# EAGLE board board (EAGLE 6.5.0)
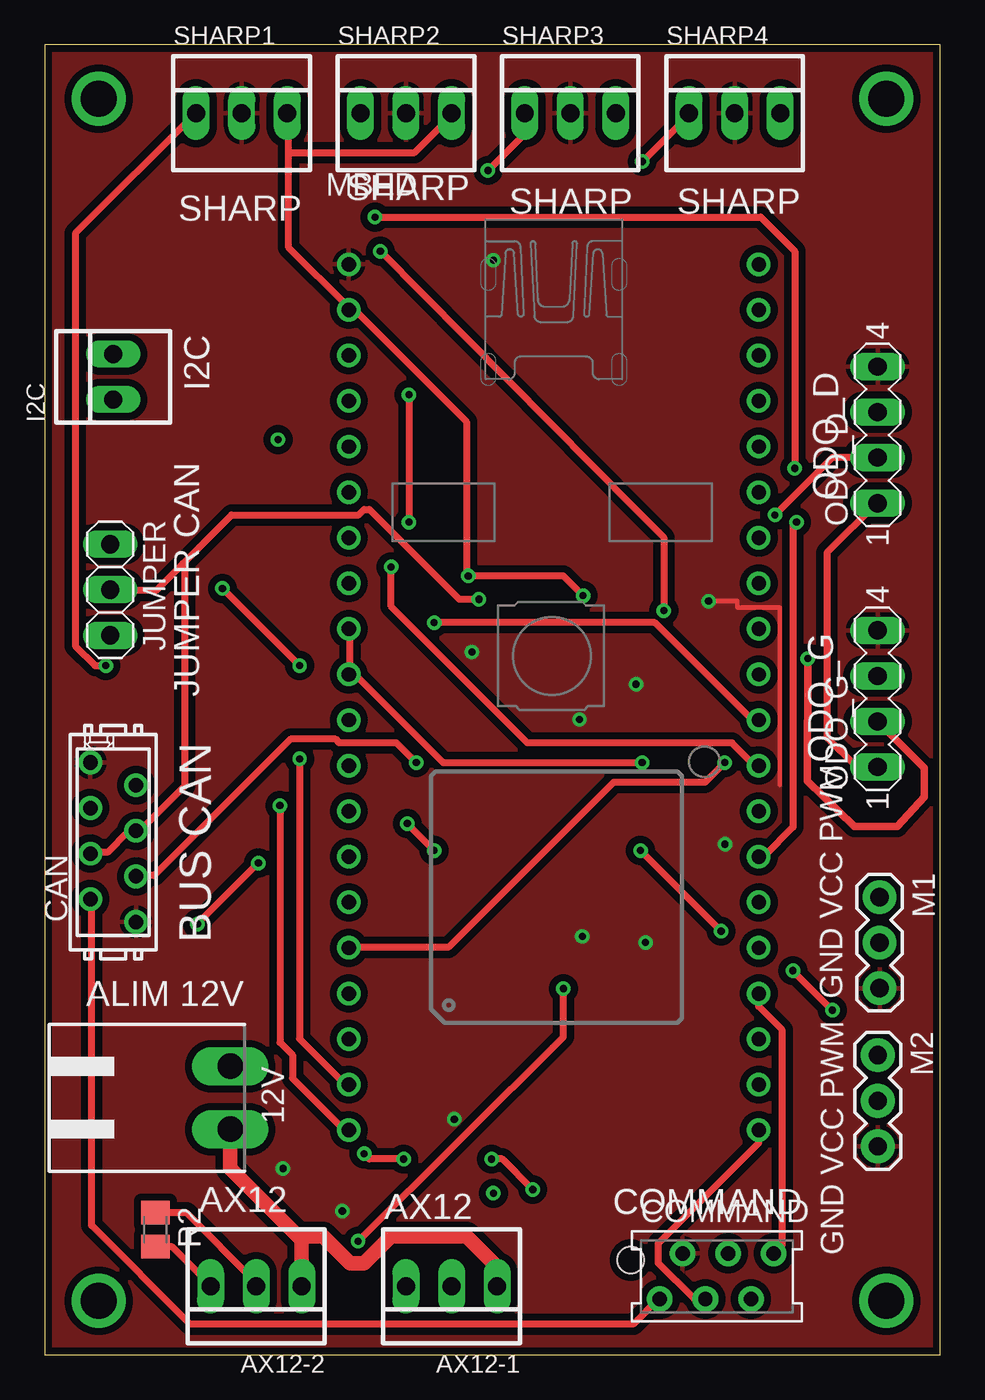
[diagram p0: board, top side]
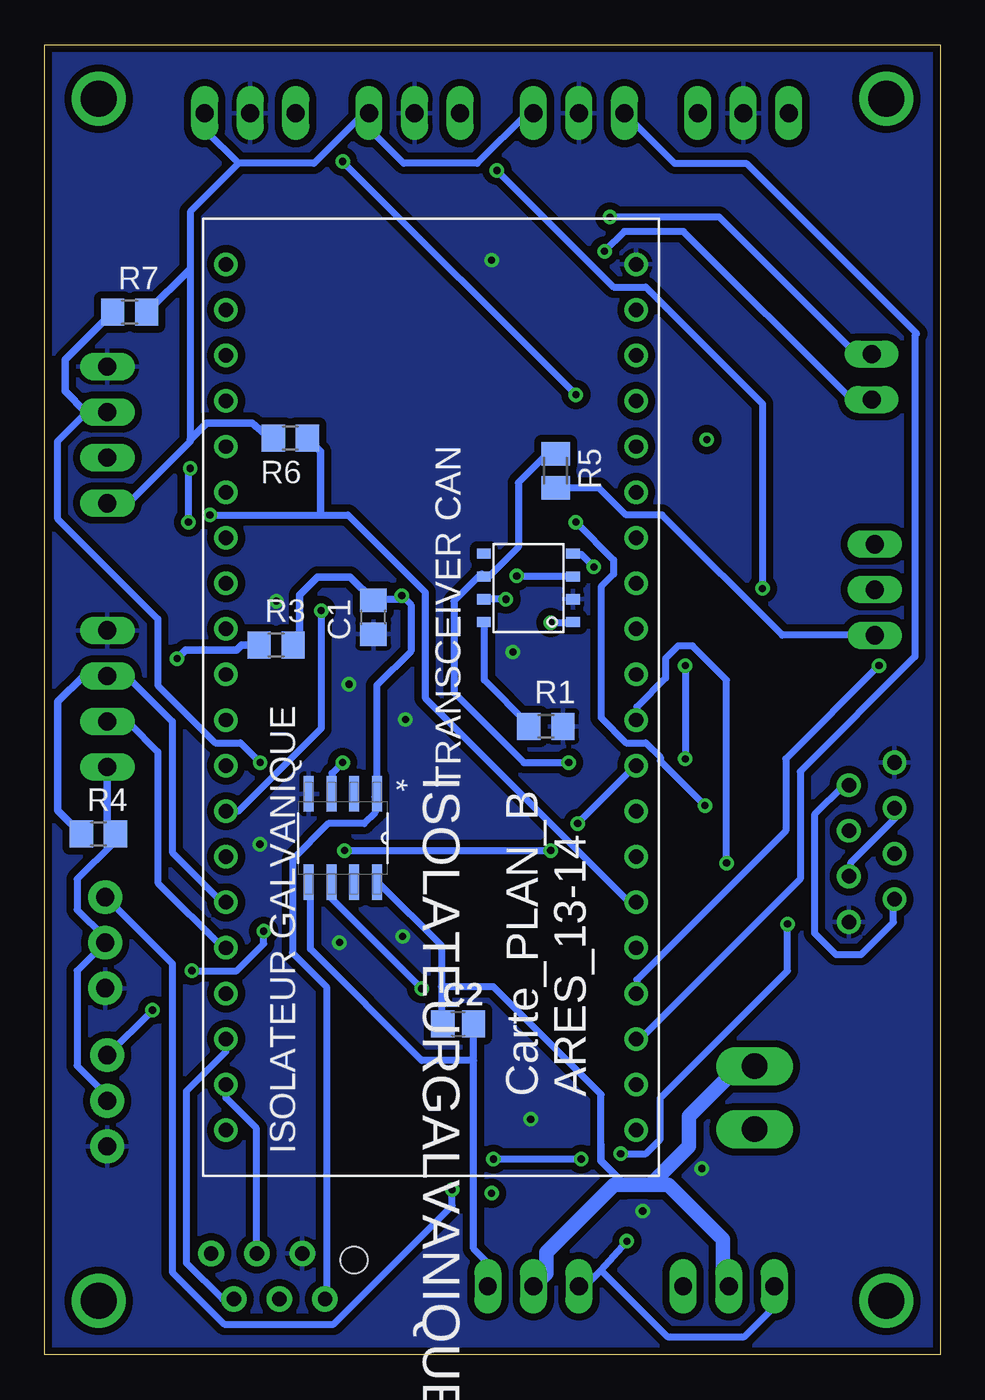
[diagram p1: board, bottom side, seen from below]

Size 49.9 x 73 mm. Coordinates in mm from the lower left corner, seen from the top.
Outline: 0,0 49.9,0 49.9,73 0,73 0,0
Copper layers (1*16): Top 0.035mm / dielectric 1.5mm / Bottom 0.035mm
Design rules "default *": minimum track width 0.4mm, minimum drill 0.4mm, track to track 0.4mm, track to pad 0.4mm, pad to pad 0.4mm, via to via 0.4mm, smd to smd 8mil, copper to edge 0.4mm, drill to drill 8mil, minimum pad ring 10mil, minimum via ring 8mil, stop-mask expansion 4mil, vias tented up to drill 0mil, thermal gap 10mil
Net classes: 1 +5V: width 0.6 mm, drill 0.2 mm, clearance 0.4 mm

## Footprints (pad centres in the part's own frame; a part is rotated, then mirrored left to right if it is on the bottom)
90G-2 = drill 1.422 long: 1 -1.75,5.25; 2 1.75,5.25
22-23-2031 = drill 1 long: 1 -2.54,0; 2 0,0; 3 2.54,0
C0805 = smd 1.3 x 1.5: 1 -0.95,0; 2 0.95,0
0805 = smd 1.3 x 1.5: 1 -0.85,0; 2 0.85,0
MICROMATCH-8 = drill 0.813: 1 4.445,1.27; 2 3.175,-1.27; 3 1.905,1.27; 4 0.635,-1.27; 5 -0.635,1.27; 6 -1.905,-1.27; 7 -3.175,1.27; 8 -4.445,-1.27
AMP-215079-6 = drill 0.8 pad 1.422: 1 0,0; 2 1.27,2.54; 3 2.54,0; 4 3.81,2.54; 5 5.08,0; 6 6.35,2.54 | hole 1.5: -1.62,2.175
22-23-2021 = drill 1 long: 1 -1.27,0; 2 1.27,0
SOIC127P600X175-8N = smd 1.981 x 0.559: 1 -2.464,1.905; 2 -2.464,0.635; 3 -2.464,-0.635; 4 -2.464,-1.905; 5 2.464,-1.905; 6 2.464,-0.635; 7 2.464,0.635; 8 2.464,1.905
1X03 = drill 1.016 long: 1 -2.54,0; 2 0,0; 3 2.54,0
1X03' = drill 1.016 pad 1.88: 1 0,0; 2 2.54,0; 3 5.08,0
MBED-KIT = drill 0.8: D+ 11.43,1.27; D- 11.43,3.81; GND -11.43,24.13; IF+ 11.43,16.51; IF- 11.43,19.05; NR -11.43,16.51; P$5 -11.43,13.97; P$6 -11.43,11.43; P$7 -11.43,8.89; P$8 -11.43,6.35; P$9 -11.43,3.81; P$10 -11.43,1.27; P$11 -11.43,-1.27; P$12 -11.43,-3.81; P$13 -11.43,-6.35; P$14 -11.43,-8.89; P$15 -11.43,-11.43; P$16 -11.43,-13.97; P$17 -11.43,-16.51; P$18 -11.43,-19.05; P$19 -11.43,-21.59; P$20 -11.43,-24.13; P$21 11.43,-24.13; P$22 11.43,-21.59; P$23 11.43,-19.05; P$24 11.43,-16.51; P$25 11.43,-13.97; P$26 11.43,-11.43; P$27 11.43,-8.89; P$28 11.43,-6.35; P$29 11.43,-3.81; P$30 11.43,-1.27; RD+ 11.43,11.43; RD- 11.43,13.97; TD+ 11.43,6.35; TD- 11.43,8.89; VB -11.43,19.05; VIN -11.43,21.59; VOUT 11.43,24.13; VU 11.43,21.59
MA04-1 = drill 1.016 long: 1 -3.81,0; 2 -1.27,0; 3 1.27,0; 4 3.81,0
R0805 = smd 1.3 x 1.5: 1 -0.95,0; 2 0.95,0
M0805 = smd 1.3 x 1.6: 1 -0.95,0; 2 0.95,0
SOIC_8 = smd 0.559 x 0.762: P1 0,-4.966; P2 1.27,-4.966; P3 2.54,-4.966; P4 3.81,-4.966; P5 3.81,0; P6 2.54,0; P7 1.27,0; P8 0,0

## Placement (x,y rotation side)
12V  WEIDMULLER 2  [90G-2]  5.08,14.32 270 top
AX12-1  molex-3  [22-23-2031]  22.67,3.81 180 top
AX12-2  molex-3  [22-23-2031]  11.78,3.81 180 top
C1  100n  [C0805]  31.59,41.1 90 bottom
C2  100u  [0805]  26.86,18.43 0 bottom
CAN  micromatch-8  [MICROMATCH-8]  3.81,28.56 90 top
COMMAND  MMATCH-6-  [AMP-215079-6]  34.28,3.1 0 top
I2C  header-2  [22-23-2021]  3.81,54.5 90 top
ISOLATEURGALVANIQUE  ADUM1250ARZ  [SOIC127P600X175-8N]  33.29,28.79 270 bottom
JUMPER  [1X03]  3.64,42.63 270 top
M1  SMALL_SERVO  [1X03']  46.53,25.5 270 top
M2  SMALL_SERVO  [1X03']  46.43,16.69 270 top
MBED  MBED_NXP_LPC1768  [MBED-KIT]  28.37,36.64 0 top
ODO_D  header-4  [MA04-1]  46.42,51.26 90 top
ODO_G  header-4  [MA04-1]  46.42,36.56 90 top
R1  21k  [R0805]  21.97,35.02 0 bottom
R2  120  [M0805]  6.16,6.97 270 top
R3  2,7k  [R0805]  37.01,39.55 0 bottom
R4  2,7k  [R0805]  46.91,29.02 0 bottom
R5  120  [M0805]  21.43,49.26 270 bottom
R6  2,7k  [R0805]  36.22,51.09 180 bottom
R7  2,7k  [R0805]  45.17,58.1 0 bottom
SHARP1  header-3  [22-23-2031]  10.97,69.2 0 top
SHARP2  header-3  [22-23-2031]  20.13,69.2 0 top
SHARP3  header-3  [22-23-2031]  29.29,69.2 0 top
SHARP4  header-3  [22-23-2031]  38.45,69.2 0 top
TRANSCEIVER  MCP2551  [SOIC_8]  25.43,40.83 90 bottom

## Library data of the parts
12V = con-weidmueller-sl35; OC_FARNELL: unknown; OC_NEWARK: unknown
AX12-1 AX12-2 SHARP1-SHARP4 = con-molex; MF: MOLEX; MPN: 22-23-2031; OC_FARNELL: 1462950; OC_NEWARK: 30C0862
C1 R1-R7 = rcl
C2 = mbed-rlcq
CAN = con-amp-micromatch; MF: FARNELL; MPN: 7-215464-8; OC_FARNELL: 3784642; OC_NEWARK: 26H0301
COMMAND = jt-con-micromatch
I2C = con-molex; MF: MOLEX; MPN: 22-23-2021; OC_FARNELL: 1462926; OC_NEWARK: 25C3832
ISOLATEURGALVANIQUE = Analog Devices_By_element14_Batch_1; MPN: ADUM1250ARZ; OC_FARNELL: 1814353; OC_NEWARK: 27M9880; PACKAGE: SOIC-8; SUPPLIER: Analog Devices
JUMPER = pinhead
M1 M2 = SparkFun-Electromechanical
MBED = MBED_v2.1
ODO_D ODO_G = con-lstb; OC_FARNELL: unknown; OC_NEWARK: unknown
TRANSCEIVER = microchip

## Nets
+5V: C1.2 CAN.2 CAN.7 COMMAND.1 ISOLATEURGALVANIQUE.1 M1.2 M2.2 MBED.VIN ODO_D.1 ODO_G.1 R3.2 R4.2 R6.2 R7.2 SHARP1.3 SHARP2.3 SHARP3.3 SHARP4.3 TRANSCEIVER.P3
+12V_DIRTY: 12V.1 AX12-1.2 AX12-2.2 C2.1 ISOLATEURGALVANIQUE.8 R2.1
CAN_RX: MBED.P$29 TRANSCEIVER.P4
CAN_TX: MBED.P$30 TRANSCEIVER.P1
CANH: CAN.4 CAN.5 JUMPER.2 TRANSCEIVER.P7
CANL: CAN.3 CAN.6 R5.1 TRANSCEIVER.P6
CHA_D: MBED.P$15 ODO_D.2 R6.1
CHA_G: MBED.P$25 ODO_G.2 R3.1
CHB_D: MBED.P$16 ODO_D.3 R7.1
CHB_G: MBED.P$26 ODO_G.3 R4.1
DATA_AX12: ISOLATEURGALVANIQUE.3 MBED.P$9 MBED.P$10
DATA_AX12_DIRTY: AX12-1.3 AX12-2.3 ISOLATEURGALVANIQUE.6 R2.2
DATA_SHARP_1: MBED.P$17 SHARP1.1
DATA_SHARP_2: MBED.P$18 SHARP2.1
DATA_SHARP_3: MBED.P$19 SHARP3.1
DATA_SHARP_4: MBED.P$20 SHARP4.1
DIR1: COMMAND.3 MBED.P$21
DIR2: COMMAND.5 MBED.P$23
GND: C1.1 CAN.1 CAN.8 COMMAND.2 ISOLATEURGALVANIQUE.4 M1.3 M2.3 MBED.GND ODO_D.4 ODO_G.4 R1.2 SHARP1.2 SHARP2.2 SHARP3.2 SHARP4.2 TRANSCEIVER.P2
GND_DIRTY: 12V.2 AX12-1.1 AX12-2.1 C2.2 ISOLATEURGALVANIQUE.5
I2C_SCL: I2C.2 MBED.P$27
I2C_SDA: I2C.1 MBED.P$28
N$1: R1.1 TRANSCEIVER.P8
N$9: JUMPER.3 R5.2
NR: MBED.NR
PWM1: M1.1 MBED.P$11
PWM2: M2.1 MBED.P$12
PWM_MOT1: COMMAND.4 MBED.P$22
PWM_MOT2: COMMAND.6 MBED.P$24
VB: MBED.VB
VO: MBED.VOUT
VU: MBED.VU

## Tracks (layer width: path | path; a pad name or v marks a point on that pad's centre or on a via)
+5V  (via drill 0.4)
  Top 0.4: v30,42.3 28.9,43.4 v23.6,43.4 23.5,43.5 23.5,52 17.4,58.1 17.1,58.1 MBED.VIN 16.9,58.4 13.6,61.7 13.6,67 | ODO_G.1 46.4,32.8 45.2,32.8 43.6,34.4 43.6,44.7 46.4,47.5 ODO_D.1 | 13.6,67 13.6,69.2 SHARP1.3 | 13.6,67 20.6,67 22.6,69 22.6,69.2 SHARP2.3 | CAN.7 2.6,25.3 2.6,7.2 8.1,1.7 32.8,1.7 34.2,3.1 COMMAND.1
  Bottom 0.4: v23.6,43.4 20.5,43.4 TRANSCEIVER.P3 | C1.2 31.5,42.1 30.2,42.1 v30,42.3 29.5,41.8 29.5,39.2 31.4,37.3 31.4,31.3 ISOLATEURGALVANIQUE.1 31.5,31.1 31.5,30.2 32.1,29.6 34.1,29.6 36.1,27.6 36.1,22.4 34.2,20.5 34.2,3.1 COMMAND.1 | CAN.7 2.6,25.3 2.6,24.1 4.4,22.3 5.8,22.3 7,23.5 7,30.1 5.4,31.7 5.1,31.7 CAN.2 | SHARP2.3 23,69.2 25.8,66.4 29.9,66.4 31.8,68.3 31.8,69.2 SHARP3.3 32,69.3 34.9,66.4 39.1,66.4 | 39.1,66.4 40.9,68.2 40.9,69.2 SHARP4.3 | 39.1,66.4 41.8,63.7 41.8,60.51 41.8,51 41.8,50.9 45.2,47.5 46.4,47.5 ODO_D.1 | M2.2 46.5,14.2 46.5,14.5 48.1,16.1 48.1,21.4 46.6,22.9 M1.2 46.6,23.1 46.6,23.3 48.1,24.8 48.1,26.5 46.1,28.5 46.1,28.9 R4.2
  Bottom 0.406: R3.2 35.71,39.55 35.71,42.35 34.71,43.35 32.89,43.35 C1.2 | R4.2 46.42,29.48 ODO_G.1 | R7.2 41.81,60.51 41.8,60.51 | R6.2 37.26,51 38.36,51.92 40.87,51.92 41.52,51.29 41.8,51
+12V_DIRTY
  Top 0.4: R2.1 6.2,7.9 7.9,7.9 11.7,4.1 11.7,3.9 AX12-2.2
  Bottom 0.4: 27.8,20.5 27.8,22.8 31.3,26.3 ISOLATEURGALVANIQUE.8 | 27.8,20.5 27.8,18.5 C2.1 | 11.8,3.9 AX12-2.2 | 10.4,16 12V.1 | 22.6,5 22.6,3.9 AX12-1.2 | 27.8,20.5 24.9,20.5 18.9,14.5 18.9,11.7
  Bottom 0.406: 18.9,11.7 18.9,10.79 17.57,9.46
  Bottom 0.813: 10.4,16 11.27,16 13.99,13.28 13.99,11.62 16.15,9.46 | 16.15,9.46 17.57,9.46 18.19,9.46 21.95,5.7 21.95,4.53 AX12-1.2 | 16.15,9.46 15.15,9.46 12.11,6.42 12.11,4.14 AX12-2.2
CAN_RX  (via drill 0.4)
  Top 0.4: v19.3,43.9 19.3,41.7 26.9,34.1 38.3,34.1 39.5,32.9 39.8,32.9 MBED.P$29
  Bottom 0.4: v19.3,43.9 20,44.6 20.4,44.6 TRANSCEIVER.P4
CAN_TX  (via drill 0.4)
  Top 0.4: v21.7,40.8 34,40.8 39.4,35.4 39.8,35.4 MBED.P$30
  Bottom 0.4: v21.7,40.8 20.5,40.8 TRANSCEIVER.P1
CANH  (via drill 0.4)
  Top 0.4: CAN.5 2.6,28 3.5,28 4.6,29.1 5,29.1 CAN.4 5.2,29.3 5.4,29.3 7.8,31.7 7.8,44 7.7,44.1 | v24.2,42.1 23.1,42.1 18.1,47.1 17.8,47.1 17.5,46.8 10.4,46.8 7.7,44.1 | 7.7,44.1 6.2,42.6 3.7,42.6 JUMPER.2
  Bottom 0.4: v24.2,42.1 TRANSCEIVER.P7
CANL  (via drill 0.4)
  Top 0.4: v20.7,33 19.6,34.1 16.4,34.1 16.2,34.3 13.7,34.3 6.1,26.7 5.1,26.7 CAN.6
  Bottom 0.4: CAN.6 5,26.7 5,27.4 2.5,29.9 2.5,30.4 CAN.3 | R5.1 21.5,50.2 21.9,50.2 23.5,48.6 23.5,45 25.1,43.4 25.4,43.4 TRANSCEIVER.P6 25.5,43.5 25.6,43.5 27.1,42 27.1,36.9 23.2,33 v20.7,33
CHA_D  (via drill 0.4)
  Top 0.4: v40.7,46.8 43.9,50 46.4,50 ODO_D.2
  Bottom 0.4: v40.7,46.8 34.52,46.8 33,46.8 28.7,42.5 28.7,36.6 17.4,25.3 17,25.3 MBED.P$15
  Bottom 0.406: R6.1 34.52,50.34 34.52,46.8
CHA_G  (via drill 0.4)
  Top 0.406: v42.53,38.79 42.5,31.96 45.13,29.43 47.51,29.43 49.02,31.08 49.02,32.69 ODO_G.2
  Bottom 0.4: MBED.P$25 39.8,22.7 40,22.7 43.6,26.3 43.6,33.6 45.2,35.2 46.4,35.2 ODO_G.2
  Bottom 0.406: R3.1 38.94,39.55 39.21,39.28 42.04,39.28 v42.53,38.79
CHB_D  (via drill 0.4)
  Top 0.4: v37.9,33 36.8,31.9 31.7,31.9 22.5,22.7 17,22.7 MBED.P$16
  Bottom 0.4: v37.9,33 39,34.1 40.4,34.1 43.6,37.3 43.6,41 49.2,46.6 49.2,50.9 47.6,52.5 46.5,52.5 ODO_D.3
  Bottom 0.406: R7.1 48.77,55.45 48.77,53.69 47.61,52.53 ODO_D.3
CHB_G
  Bottom 0.4: MBED.P$26 39.8,25.3 40.1,25.3 42.8,28 42.8,35.3 45.3,37.8 46.4,37.8 ODO_G.3
  Bottom 0.406: R4.1 49.17,30.33 49.17,36.39 47.73,37.83 ODO_G.3
DATA_AX12  (via drill 0.4)
  Top 0.4: v33.3,33 22.2,33 17.3,37.9 17,37.9 MBED.P$10 17,38.1 17,40.4 MBED.P$9
  Bottom 0.4: v33.3,33 33.9,32.4 33.9,31.3 ISOLATEURGALVANIQUE.3
DATA_AX12_DIRTY  (via drill 0.4)
  Top 0.4: v28.9,20.4 28.9,17.7 v17.46,6.32 | R2.2 6.2,6 7.1,6 9.2,3.9 AX12-2.3
  Bottom 0.4: v28.9,20.4 33.9,25.4 33.9,26.3 ISOLATEURGALVANIQUE.6 | 18.9,4.7 19.7,3.9 20.1,3.9 AX12-1.3 | 18.9,4.7 v17.46,6.32 | 18.9,4.7 15.2,1 10.9,1 9.3,2.6 9.3,3.8 AX12-2.3
DATA_SHARP_1  (via drill 0.4)
  Top 0.4: v3.4,38.4 2.8,38.4 1.7,39.5 1.7,62.5 8.4,69.2 SHARP1.1
  Bottom 0.4: v3.4,38.4 8.6,33.2 8.6,29.2 16.9,20.9 16.9,20.2 MBED.P$17
DATA_SHARP_2
  Bottom 0.4: MBED.P$18 16.9,17.6 16.7,17.6 7.8,26.5 7.8,32.5 1.4,38.9 1.4,56.8 1.3,56.9 10.8,66.4 14.8,66.4 SHARP2.1
DATA_SHARP_3  (via drill 0.4)
  Top 0.4: v14.2,33.2 14.2,17.6 16.7,15.1 16.9,15.1 MBED.P$19 | v9.9,42.7 v14.2,38.4 | v24.7,66 26.7,68 26.7,69.2 SHARP3.1
  Bottom 0.4: v14.2,38.4 v14.2,33.2 | v9.9,42.7 9.9,53 16.4,59.5 18.2,59.5 v24.7,66
DATA_SHARP_4  (via drill 0.4)
  Top 0.4: v13.1,30.6 13.1,17.4 13.8,16.7 13.8,15.4 16.6,12.6 16.9,12.6 MBED.P$20 | v20.3,53.5 v20.3,46.4 | v33.3,66.5 36,69.2 SHARP4.1
  Bottom 0.4: v13.1,30.6 15.6,33.1 15.6,33.3 16.4,34.1 17.5,34.1 18.9,35.5 18.9,42.8 18.2,43.5 18.2,44.3 v20.3,46.4 | v33.3,66.5 v20.3,53.5
DIR1
  Top 0.4: MBED.P$21 39.8,11.8 34.2,6.2 34.2,5.1 36.2,3.1 COMMAND.3
DIR2
  Bottom 0.4: MBED.P$23 39.8,16.9 42,14.7 42,5.1 40,3.1 COMMAND.5
GND  (via drill 0.4)
  Top 0.254: v37,42 38.59,42 38.59,41.64 40.98,41.64 40.98,31.74
  Bottom 0.4: TRANSCEIVER.P2 20.5,42.1 20.45,42.11
  other vias: 25,61 33.48,22.97 29.96,23.31 23.81,39.16 29.8,35.4 32.95,37.36 13.28,10.37 16.58,8 22.82,13.12 37.91,28.45
  pour Bottom: 0,73 50,73 50,0 0,0
  pour Top: 0,73 50,73 50,0 0,0
GND_DIRTY
  Top 0.4: 14.24,6.48 14.3,6.6 | 14.3,3.9 AX12-2.1 | 25.2,3.9 AX12-1.1
  Top 0.813: 14.3,3.9 14.3,6.6 15.5,6.6 17,5.1 17.8,5.1 19.3,6.6 23.5,6.6 25.2,4.9 25.2,3.9 | 14.24,6.48 10.34,10.38 12V.2
  Bottom 0.4: 26,16.4 26,5.9 25.3,5.2 25.3,3.9 AX12-1.1 | 26,16.4 26,18.4 C2.2 | 26,16.4 28.9,16.4 35.1,22.6 35.1,26.3 ISOLATEURGALVANIQUE.5
I2C_SCL  (via drill 0.4)
  Top 0.4: v41.9,46.4 41.7,46.2 41.7,29.4 40.1,27.8 39.8,27.8 MBED.P$27 | v41.8,49.4 41.8,61.5 39.9,63.4 v18.4,63.4
  Bottom 0.4: v41.9,46.4 41.9,49.3 v41.8,49.4 | v18.4,63.4 12.3,63.4 4.7,55.8 3.9,55.8 I2C.2
I2C_SDA  (via drill 0.4)
  Top 0.4: v18.7,61.5 32.92,47.13 34.5,45.55 v34.5,41.47
  Bottom 0.4: v34.5,41.47 34.5,34.9 39.1,30.3 MBED.P$28 | v18.7,61.5 17.6,62.6 14.3,62.6 5,53.3 3.9,53.3 I2C.1
N$1
  Bottom 0.4: TRANSCEIVER.P8 25.4,40.8 25.4,37.6 22.9,35.1 R1.1
N$2  (via drill 2)
  other vias: 46.9,70
N$3  (via drill 2)
  other vias: 3,70
N$4  (via drill 2)
  other vias: 46.9,3
N$5  (via drill 2)
  other vias: 3,3
N$9
  Bottom 0.4: R5.2 21.4,48.3 19,48.3 17.5,46.8 15.5,46.8 8.8,40.1 3.7,40.1 JUMPER.3
N$10  (via drill 0.4)
  other vias: 13,51
N$12  (via drill 0.4)
  other vias: 25,9
PWM1  (via drill 0.4)
  Top 0.4: v8.5,24 v11.9,27.4 | v17.8,11.2 18.1,10.9 v20,10.9 | v24.9,10.9 25.5,10.9 v27.2,9.2
  Bottom 0.4: v11.9,27.4 11.9,37.6 13.8,39.5 14.6,39.5 15.3,38.8 15.3,37.7 16.9,36.1 16.9,35.4 MBED.P$11 | v8.5,24 8.5,21.4 15.6,14.3 15.6,12 16.4,11.2 v17.8,11.2 | v24.9,10.9 v20,10.9 | v27.2,9.2 27.2,8.3 33.8,1.7 39.9,1.7 42.8,4.6 42.8,21.8 46.5,25.5 M1.1
PWM2  (via drill 0.4)
  Top 0.4: v21.7,28.1 v20.2,29.6 | v37.7,23.6 v33.2,28.1 | v43.9,19.2 v41.7,21.4
  Bottom 0.4: v20.2,29.6 17,32.8 MBED.P$12 | v33.2,28.1 v21.7,28.1 | v37.7,23.6 37.7,22.9 39.2,21.4 v41.7,21.4 | v43.9,19.2 46.4,16.7 M2.1
PWM_MOT1
  Bottom 0.4: MBED.P$22 39.8,14.3 38.1,12.6 38.1,5.7 COMMAND.4
PWM_MOT2
  Top 0.4: MBED.P$24 39.8,19.4 41.1,18.1 41.1,6.1 40.7,5.7 COMMAND.6

## Text on the board
tPlace: SHARP | SHARP | SHARP | SHARP | ODO_D | I2C | ODO_G | JUMPER CAN | BUS CAN | GND VCC PWM | ALIM 12V | AX12 | AX12 | COMMAND | GND VCC PWM
bPlace: TRANSCEIVER CAN | ISOLATEUR GALVANIQUE | Carte_PLAN_B / ARES_13-14